# EAGLE board picoAvaR11 (EAGLE 6.1)
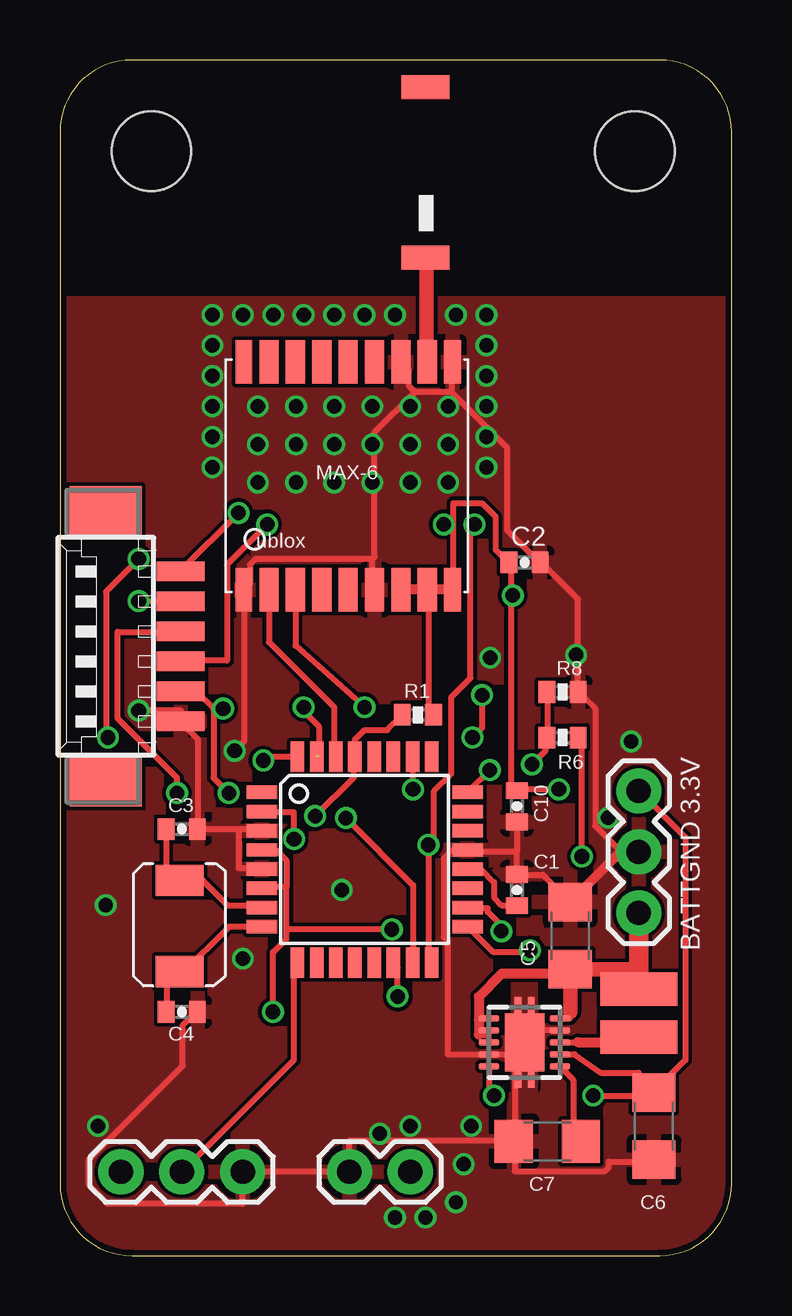
[diagram p0: board, top side]
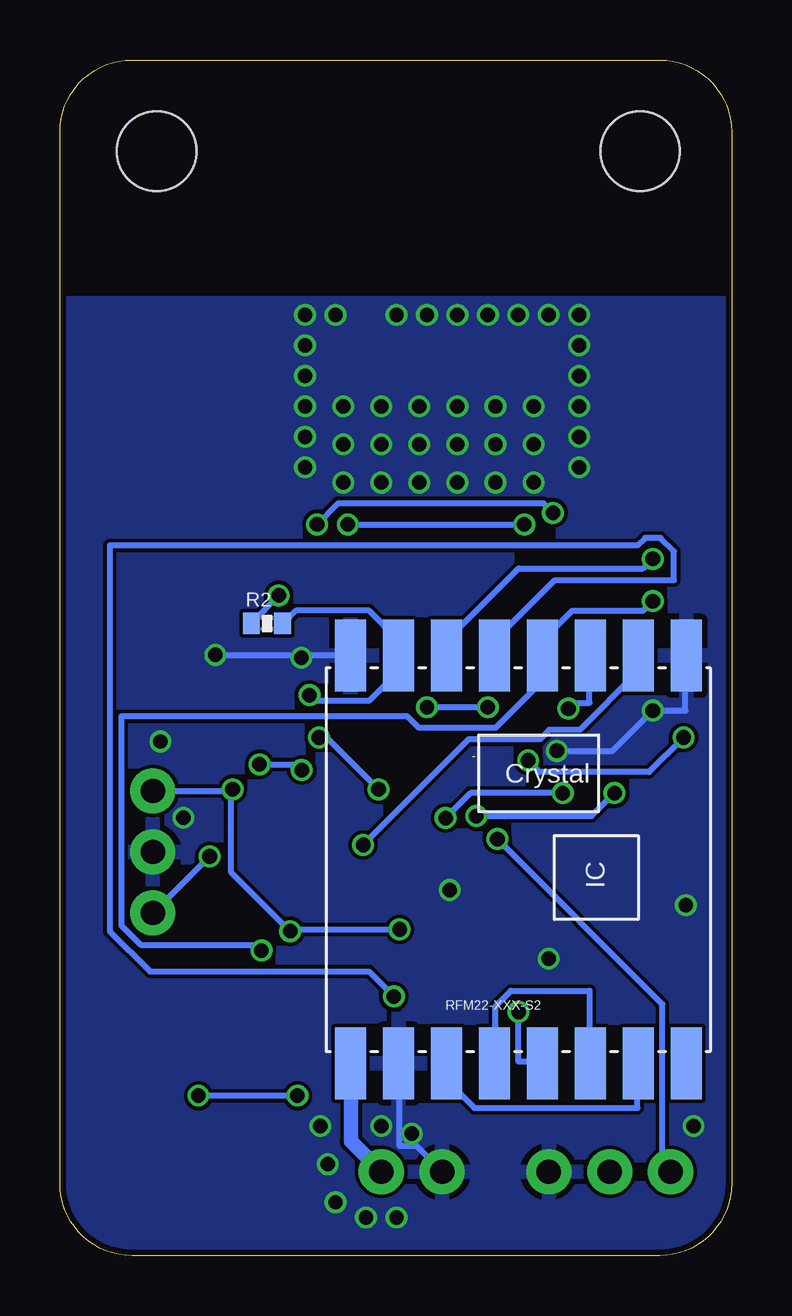
[diagram p1: board, bottom side, seen from below]

Size 28 x 49.84 mm. Coordinates in mm from the lower left corner, seen from the top.
Outline: 25,49.84 3,49.84 arc90 0,46.84 0,3 arc90 3,0 25,0 arc90 28,3 28,46.84 arc90 25,49.84
Copper layers (1*16): Top 0.035mm / dielectric 1.5mm / Bottom 0.035mm
Design rules: minimum track width 6mil, minimum drill 12mil, track to track 6mil, track to pad 6mil, pad to pad 6mil, via to via 6mil, smd to smd 0mil, copper to edge 10mil, drill to drill 10mil, minimum pad ring 10mil, minimum via ring 6mil, stop-mask expansion 2mil, vias tented up to drill 100mil, thermal gap 10mil
Net classes: 0 default: width 0.203 mm; 1 vcc: width 0.254 mm

## Footprints (pad centres in the part's own frame; a part is rotated, then mirrored left to right if it is on the bottom)
0402-CAP = smd 0.7 x 0.9: 1 -0.65,0; 2 0.65,0
1206 = smd 1.6 x 1.8: 1 -1.4,0; 2 1.4,0
1X03 = drill 1.016 pad 1.88: 1 0,0; 2 2.54,0; 3 5.08,0
S-PDSO-N10 = smd 0.28 x 0.85: 1 -1,-1.475; 2 -0.5,-1.475; 3 0,-1.475; 4 0.5,-1.475; 5 1,-1.475; 6 1,1.475; 7 0.5,1.475; 8 0,1.475; 9 -0.5,1.475; 10 -1,1.475 | smd 2.4 x 1.65: PP 0,0 | smd 3.8 x 0.28: PP@1 0,0.275; PP@2 0,-0.275
STAND-OFF = hole 3.302: 0,0
ELLVGG_INDUCTOR = smd 1.4 x 3.2: P$1 -3.81,0; P$2 -1.81,0
0402-RES = smd 0.7 x 0.9: 1 -0.65,0; 2 0.65,0
1X02 = drill 1.016 pad 1.88: 1 0,0; 2 2.54,0
RFM22-XXX-S2 = smd 3 x 1.3: 1 -8.5,7; 2 -8.5,5; 3 -8.5,3; 4 -8.5,1; 5 -8.5,-1; 6 -8.5,-3; 7 -8.5,-5; 8 -8.5,-7; 9 8.5,-7; 10 8.5,-5; 11 8.5,-3; 12 8.5,-1; 13 8.5,1; 14 8.5,3; 15 8.5,5; 16 8.5,7
TQFP32-08 = smd 1.27 x 0.559: 1 -4.293,2.8; 2 -4.293,2; 3 -4.293,1.2; 4 -4.293,0.4; 5 -4.293,-0.4; 6 -4.293,-1.2; 7 -4.293,-2; 8 -4.293,-2.8; 17 4.293,-2.8; 18 4.293,-2; 19 4.293,-1.2; 20 4.293,-0.4; 21 4.293,0.4; 22 4.293,1.2; 23 4.293,2; 24 4.293,2.8 | smd 0.559 x 1.27: 9 -2.8,-4.293; 10 -2,-4.293; 11 -1.2,-4.293; 12 -0.4,-4.293; 13 0.4,-4.293; 14 1.2,-4.293; 15 2,-4.293; 16 2.8,-4.293; 25 2.8,4.293; 26 2,4.293; 27 1.2,4.293; 28 0.4,4.293; 29 -0.4,4.293; 30 -1.2,4.293; 31 -2,4.293; 32 -2.8,4.293
UBLOX_MAX-6 = smd 1.8 x 0.7: 1_GND 4.95,-4.4; 9_V_RESET 4.95,4.3; 10_GND -4.55,4.3; 18_RESERVED -4.55,-4.4 | smd 1.8 x 0.8: 2_TXD1 4.95,-3.35; 3_RXD1 4.95,-2.25; 4_TIMEPULSE 4.95,-1.15; 5_EXTINT0 4.95,-0.05; 6_V_BCKP 4.95,1.05; 7_VCC_IO 4.95,2.15; 8_VCC 4.95,3.25; 11_RF_IN -4.55,3.25; 12_GND -4.55,2.15; 13_ANTON -4.55,1.05; 14_VCC_RF -4.55,-0.05; 15_RESERVED -4.55,-1.15; 16_SDA2 -4.55,-2.25; 17_SCL2 -4.55,-3.35
ABRACON_ABM3_CRYSTAL = smd 1.3 x 2: P$1 -3.4,0.1; P$2 0.4,0.1
JTI_ANTENNA-1575AT43A40 = smd 1 x 2: FEED -3.81,-1.27; NC 3.29,-1.27
53261-06 = smd 0.8 x 2: 1 3.125,-2.5; 2 1.875,-2.5; 3 0.625,-2.5; 4 -0.625,-2.5; 5 -1.875,-2.5; 6 -3.125,-2.5 | smd 2.1 x 3: S1 5.625,0.625; S2 -5.625,0.625

## Placement (x,y rotation side)
C1  0.1uF  [0402-CAP]  19.05,15.24 270 top
C2  0.1uF  [0402-CAP]  19.37,28.89 0 top
C3  18pF  [0402-CAP]  5.08,17.78 0 top
C4  18pF  [0402-CAP]  5.08,10.16 0 top
C5  10uF  [1206]  21.27,13.34 90 top
C6  10uF  [1206]  24.77,5.4 270 top
C7  10uF  [1206]  20.32,4.76 180 top
C10  0.1uF  [0402-CAP]  19.05,18.73 270 top
DBS  [1X03]  7.62,3.49 180 top
IC2  TPS61201  [S-PDSO-N10]  19.37,8.89 90 top
JP1  STAND-OFF  [STAND-OFF]  3.81,46.04 0 top
JP2  STAND-OFF  [STAND-OFF]  23.97,46.04 0 top
L1  2.2uH  [ELLVGG_INDUCTOR]  24.13,7.3 270 top
POWER  [1X03]  24.13,14.29 90 top
R1  10k  [0402-RES]  14.92,22.54 0 top
R2  10k  [0402-RES]  19.37,26.35 0 bottom
R6  100k  [0402-RES]  20.95,21.59 180 top
R8  10k  [0402-RES]  20.95,23.5 0 top
RFANT  [1X02]  12.06,3.49 0 top
RFM22-XXX-S2  RFM22  [RFM22-XXX-S2]  8.89,16.51 90 bottom
U1  ATMEGA328  [TQFP32-08]  12.7,16.51 0 top
U$1  UBLOX_MAX-6  [UBLOX_MAX-6]  12.06,32.7 270 top
U$2  ABRACON_ABM3_CRYSTAL  [ABRACON_ABM3_CRYSTAL]  5.08,15.24 90 top
U$3  JTI_ANTENNA-1575AT43A40  [JTI_ANTENNA-1575AT43A40]  13.97,45.4 90 top
X1  53261-06  [53261-06]  2.54,25.4 90 top

## Library data of the parts
C1-C7 C10 DBS JP1 JP2 POWER R1 R2 R6 R8 RFANT RFM22-XXX-S2 U1 = SparkFun
IC2 = texas; MPN: TPS61201DRCT; OC_FARNELL: unknown; OC_NEWARK: 37M0068
L1 U$1-U$3 = ava
X1 = con-molex; OC_FARNELL: 1125375; OC_NEWARK: unknown

## Nets
AREF: C1.2 U1.20
GND [vcc]: C1.1 C2.2 C3.2 C4.2 C5.2 C6.2 C7.2 C10.2 DBS.1 IC2.4 IC2.9 IC2.PP IC2.PP@1 IC2.PP@2 POWER.2 R8.2 RFANT.1 RFM22-XXX-S2.2 RFM22-XXX-S2.9 RFM22-XXX-S2.16 U1.3 U1.5 U1.21 U$1.1_GND U$1.6_V_BCKP U$1.10_GND U$1.12_GND X1.6
MISO: RFM22-XXX-S2.10 U1.16 X1.1
MOSI: RFM22-XXX-S2.11 U1.15 X1.5
N$3: RFANT.2 RFM22-XXX-S2.1
N$4: U$1.11_RF_IN U$3.FEED
N$5: RFM22-XXX-S2.3 RFM22-XXX-S2.7
N$6: RFM22-XXX-S2.4 RFM22-XXX-S2.6
N$7: IC2.3 L1.P$2
N$9: C3.1 U1.7 U$2.P$2
N$10: C4.1 U1.8 U$2.P$1
N$11: C7.1 IC2.1
NSS_RX: DBS.2 U1.9
NSS_TX: DBS.3 U1.2
RESET: R1.1 U1.29 X1.3
RFM22_NIRQ: RFM22-XXX-S2.14 U1.32
RFM22_NSEL: RFM22-XXX-S2.13 U1.14
RFM22_SDN: R2.2 RFM22-XXX-S2.15 U1.26
SCK: RFM22-XXX-S2.12 U1.17 X1.2
UBLOX_RXD: U1.31 U$1.3_RXD1
UBLOX_TXD: U1.30 U$1.2_TXD1
VBATT [vcc]: C5.1 IC2.5 IC2.6 IC2.7 IC2.8 L1.P$1 POWER.1 R6.1
VBATTADC: R6.2 R8.1 U1.24
VCC: C2.1 C6.1 C10.1 IC2.2 IC2.10 POWER.3 R1.2 R2.1 RFM22-XXX-S2.5 U1.4 U1.6 U1.18 U$1.7_VCC_IO U$1.8_VCC U$1.9_V_RESET X1.4

## Tracks (layer width: path | path; a pad name or v marks a point on that pad's centre or on a via)
AREF
  Top 0.254: U1.20 17.55,16.11 18.1,15.56 18.1,14.92 18.41,14.61 19.04,14.61 | 19.04,14.61 19.05,14.61 | C1.2 19.04,14.64 19.04,14.61
GND  (via drill 0.6, 0.61)
  Top 0.254: IC2.4 19.68,9.39 19.68,8.96 | 19.68,8.96 19.68,8.89 | IC2.PP@1 IC2.PP 19.44,8.88 19.52,8.88 IC2.PP@2 19.68,8.96 | IC2.PP@1 19.09,8.39 IC2.9 17.84,8.4 16.16,8.4 16.16,13.12 16,13.28 16,16.56 16.32,16.88 16.88,16.88 U1.21 17.04,16.88 17.14,16.83 19.05,16.83 | C10.2 19.05,16.83 | C1.1 19.05,15.88 20.13,15.88 C5.2 | C1.1 19.05,15.92 | 19.05,15.92 19.05,16.83 | C7.2 18.96,4.8 18.96,8.32 IC2.PP@1 | C6.2 24.72,3.92 22.88,3.92 22.88,3.68 22.72,3.52 18.96,3.52 18.96,4.64 C7.2 | C4.2 5.68,10.16 5.12,9.6 5.12,7.92 1.2,4 1.2,2.96 2,2.16 7.6,2.16 7.6,3.44 DBS.1 7.68,3.52 12,3.52 RFANT.1 12.08,3.6 12.08,4.8 18.8,4.8 C7.2 | C1.1 19.04,15.92 19.05,15.92 | 21.6,25.04 21.6,23.52 R8.2 21.68,23.44 22.32,22.8 22.32,17.92 23.28,16.96 POWER.2 | 21.6,25.04 21.6,27.36 20.08,28.88 C2.2 19.92,28.96 18.64,30.24 18.64,33.68 16.32,36 | v21.52,25.04 21.6,25.04 | 7.44,17.76 8.4,17.76 U1.3 | 7.44,17.76 5.76,17.76 C3.2 5.76,17.84 5.76,21.52 5.04,22.24 X1.6 5.04,22.72 v3.28,22.72 | 7.44,17.76 7.44,16.16 8.4,16.16 U1.5 | 14.8,36 14.56,36.24 14.56,36.88 14.24,37.2 U$1.12_GND | 16.32,36 14.8,36 | 16.32,36 16.32,37.2 U$1.10_GND | 13.04,29.04 8.16,29.04 7.92,28.8 7.92,28 7.68,27.76 U$1.1_GND 7.68,27.68 7.68,21.44 v7.28,21.04 | 13.04,29.04 13.04,27.76 U$1.6_V_BCKP | 14.8,36 13.12,34.32 13.12,29.12 13.04,29.04
  Top 0.406: POWER.2 23.36,16.83 C5.2
  Bottom 0.254: RFM22-XXX-S2.2 13.84,8 13.84,4.56 13.12,4.56 12.08,3.52 RFANT.1 | v21.52,25.04 15.92,25.04 RFM22-XXX-S2.16 | RFM22-XXX-S2.9 1.92,24.96 1.92,22.72 v3.28,22.72 4.96,21.04 v7.28,21.04
  other vias: 1.91,14.61 7.62,12.38 11.75,15.24 14.61,5.4 17.14,5.4 16.83,3.81 16.51,2.22 15.24,1.59 13.97,1.59 13.34,5.08 1.59,5.4 17.94,24.92 23.81,21.43 13.97,39.21 16.51,39.21 16.19,35.4 16.19,32.23 16.19,33.81 8.26,35.4 8.26,32.23 8.26,33.81 9.84,35.4 9.84,32.23 9.84,33.81 11.43,35.4 11.43,32.23 11.43,33.81 13.02,35.4 13.02,32.23 13.02,33.81 14.61,35.4 14.61,32.23 14.61,33.81 12.7,39.21 11.43,39.21 10.16,39.21 8.89,39.21 7.62,39.21 6.35,39.21 6.35,37.94 6.35,36.67 6.35,35.4 6.35,34.13 17.78,39.21 17.78,37.94 17.78,36.67 17.78,35.4 6.35,32.86 17.78,34.13 17.78,32.86 22.86,18.26
  pour Top: 0,39.7 28.26,39.7 28.26,-0.16 0,0
  pour Bottom: 0,39.7 28.1,39.7 28.26,-0.16 0,0
MISO  (via drill 0.61)
  Top 0.254: U1.16 15.44,12.24 15.36,12.32 v15.36,17.12 15.6,17.36 15.6,19.36 16.32,20.08 16.32,23.28 17.12,24.08 17.12,30.32 v17.28,30.48 | v7.44,30.96 5.04,28.56 X1.1
  Bottom 0.254: v15.36,17.12 10.96,21.52 8,21.52 7.6,21.92 6.32,21.92 3.92,24.32 3.92,24.96 RFM22-XXX-S2.10 | v7.44,30.96 7.84,31.36 16.4,31.36 v17.28,30.48
MOSI  (via drill 0.61)
  Top 0.254: v11.92,18.24 14.72,15.44 14.72,12.24 U1.15 | v7.04,19.28 6.4,19.92 6.4,22.8 | 6.4,22.8 5.68,23.52 X1.5 | 6.4,22.8 v6.8,22.8
  Bottom 0.254: v11.92,18.24 10.88,19.28 v7.04,19.28 | v6.8,22.8 6.56,23.04 5.92,23.04 5.92,24.96 RFM22-XXX-S2.11
N$3
  Bottom 0.254: 15.88,8 RFM22-XXX-S2.1
  Bottom 0.61: 15.88,8 15.88,4.76 RFANT.2
N$4
  Top 0.254: 15.28,37.28 U$1.11_RF_IN | 15.28,41.52 U$3.FEED
  Top 0.61: 15.28,41.52 15.28,37.28
N$5
  Bottom 0.254: RFM22-XXX-S2.7 3.92,8 3.92,6.16 10.72,6.16 11.84,7.28 11.84,8 RFM22-XXX-S2.3
N$6
  Bottom 0.254: RFM22-XXX-S2.6 5.92,8.08 5.92,11.04 9.2,11.04 9.84,10.4 9.84,8.08 RFM22-XXX-S2.4
N$7
  Top 0.254: IC2.3 21.59,8.89
  Top 0.406: 24.13,9.21 L1.P$2 24.13,8.89 21.59,8.89
N$9
  Top 0.254: U1.7 8.31,14.61 6.99,14.61 5.95,15.64 U$2.P$2 4.9,15.56 4.45,15.56 4.43,15.57 C3.1
N$10
  Top 0.254: U1.8 7.04,13.71 5.08,11.75 5.07,11.75 U$2.P$1 4.54,11.84 4.45,11.75 4.45,10.18 C4.1
N$11
  Top 0.254: 21.4,4.89 21.27,4.76 21.59,4.76 21.68,4.8 C7.1 21.4,5.08 21.4,7.33 20.8,7.94 IC2.1
NSS_RX
  Top 0.254: U1.9 9.84,12.16 9.76,12.08 9.76,8.16 5.12,3.52 DBS.2
NSS_TX  (via drill 0.61)
  Top 0.254: v9.76,17.36 9.76,18.48 8.48,18.48 U1.2
  Bottom 0.254: v9.76,17.36 2.88,10.48 2.88,3.52 2.56,3.52 DBS.3
RESET  (via drill 0.61)
  Top 0.254: R1.1 13.64,21.91 12.7,21.91 12.3,21.51 U1.29 12.24,20.72 12.24,19.92 v10.64,18.32 | v4.88,19.28 4.88,19.92 2.4,22.4 2.4,26 5.04,26 X1.3
  Bottom 0.254: v4.88,19.28 5.84,18.32 v10.64,18.32
RFM22_NIRQ  (via drill 0.61)
  Top 0.254: v8.48,20.64 8.48,20.8 9.84,20.8 U1.32 | v2,21.6 1.92,21.68 1.92,27.68 v3.28,29.04
  Bottom 0.254: v8.48,20.64 8,20.16 3.44,20.16 v2,21.6 | v3.28,29.04 3.68,28.64 8.88,28.64 11.84,25.68 11.84,25.04 RFM22-XXX-S2.14
RFM22_NSEL  (via drill 0.61)
  Top 0.254: v14.08,10.8 14.08,12 13.92,12.16 U1.14
  Bottom 0.254: v14.08,10.8 15.12,11.84 24.24,11.84 25.92,13.52 25.92,29.6 3.92,29.6 3.6,29.92 2.96,29.92 2.4,29.36 2.4,28.16 7.36,28.16 9.84,25.68 9.84,25.04 RFM22-XXX-S2.13
RFM22_SDN  (via drill 0.61)
  Top 0.254: v14.72,19.44 14.72,20.8 U1.26 | v17.2,21.6 17.6,22 v17.6,23.36
  Bottom 0.254: R2.2 18.64,26.4 18.16,26.88 15.12,26.88 13.92,25.68 13.92,25.04 RFM22-XXX-S2.15 14,24.96 14,24.24 15.12,23.12 17.36,23.12 v17.6,23.36 | v14.72,19.44 16.88,21.6 v17.2,21.6
SCK  (via drill 0.61)
  Top 0.254: v19.6,12.72 19.6,12.64 18.08,12.64 17.04,13.68 U1.17 | v3.28,27.28 X1.2
  Bottom 0.254: v19.6,12.72 19.84,12.96 24.64,12.96 25.44,13.76 25.44,22.48 13.52,22.48 13.04,22 9.84,22 7.92,23.92 7.92,24.96 RFM22-XXX-S2.12 7.84,25.12 7.84,25.68 6.64,26.88 3.68,26.88 v3.28,27.28
UBLOX_RXD  (via drill 0.6)  (1 unrouted)
  Top 0.254: U$1.3_RXD1 9.81,25.43 v12.7,22.86 | 10.79,20.9 U1.31 | v10.16,22.86 10.16,22.7 10.79,22.07 10.79,20.8
  Bottom 0.254: v12.7,22.86 v10.16,22.86
UBLOX_TXD
  Top 0.254: U$1.2_TXD1 8.71,25.57 11.43,22.86 11.43,20.73 | 11.43,20.64 11.43,20.73 | 11.43,20.73 U1.30
VBATT  (via drill 0.61)
  Top 0.254: 21.27,10.16 21.27,9.89 IC2.5 21,9.89 21.27,10.16 | 21.27,10.16 21.27,11.43 20.95,11.75 | 17.46,9.21 17.71,9.21 IC2.7 IC2.8 | IC2.6 17.51,9.89 17.46,9.84 | v21.76,16.64 21.76,21.44 21.68,21.52 R6.1
  Top 0.406: 20.95,11.75 18.41,11.75 17.46,10.79 17.46,9.84 17.46,9.21
  Top 0.61: 21.27,10.16 C5.1 24.13,11.94 L1.P$1
  Top 0.813: L1.P$1 POWER.1
  Bottom 0.254: v21.76,16.64 24.08,14.32 POWER.1
VBATTADC  (via drill 0.61)
  Top 0.254: R8.1 20.32,23.44 20.32,21.6 R6.2 20.24,21.52 20.24,21.04 v19.68,20.48 | v17.92,20.24 17.04,19.36 U1.24
  Bottom 0.254: v17.92,20.24 18.16,20.48 v19.68,20.48
VCC  (via drill 0.6, 0.61)
  Top 0.254: IC2.10 17.89,6.87 v18.1,6.67 | v22.23,6.67 24.13,6.67 24.13,6.8 | IC2.2 21.45,8.39 22.54,7.62 24.13,7.62 24.13,6.8 | R1.2 15.52,22.56 15.36,22.72 15.36,27.68 U$1.8_VCC | 14.24,27.76 U$1.7_VCC_IO | 15.2,27.76 U$1.8_VCC | 16.4,30.48 16.4,27.76 U$1.9_V_RESET 16.24,27.76 | 16.4,30.48 16.4,31.36 17.6,31.36 18.16,30.8 18.16,29.44 18.64,28.96 C2.1 18.8,28.8 18.8,27.52 | 18.8,27.52 18.8,19.68 19.04,19.44 C10.1 19.12,19.44 v20.8,19.44 | v18.88,27.52 18.8,27.52 | v8.64,30.48 6.96,28.8 6.96,24.8 5.04,24.8 X1.4 | 16.4,30.48 v16,30.48 | 15.44,27.76 U$1.8_VCC | 9.44,15.36 8.48,15.36 U1.6 | 9.44,15.36 9.44,16.48 9.04,16.88 8.48,16.88 U1.4 | 9.44,13.6 9.44,13.2 8.88,12.64 v8.88,10.16 | 9.44,13.6 9.44,15.36 | 24.13,6.8 24.72,6.8 C6.1 24.8,6.88 26.08,8.16 26.08,17.44 24.16,19.36 POWER.3 | v18.4,13.52 18.4,13.76 17.84,14.32 17.84,14.48 17.04,14.48 U1.18 | v13.84,13.6 9.44,13.6
  Top 0.406: 15.2,27.76 14.24,27.76 | 16.24,27.76 15.44,27.76
  Bottom 0.254: v18.1,6.67 v22.23,6.67 | v18.88,27.52 20,26.4 R2.1 | v16,30.48 v8.64,30.48 | v8.88,10.16 8.88,8.08 7.92,8.08 RFM22-XXX-S2.5 | 20.88,19.36 20.88,16 v18.4,13.52 18.32,13.6 v13.84,13.6 | 20.88,19.36 24.08,19.36 POWER.3 | v20.8,19.44 20.88,19.36

## Text on the board
tPlace: 3.3V | GND | BATT
tStop: µAva